# EAGLE board Maya - Leonardo 32U4 board v61 (EAGLE 9.7.0)

Size 39.43 x 37.79 mm. Coordinates in mm from the lower left corner, seen from the top.
Outline: 0.06,0 39.41,0.1 39.43,37.79 0,37.72 0.06,0
Copper layers (1*16): Top 0.035mm / dielectric 1.5mm / Bottom 0.035mm
Design rules "default *": minimum track width 6mil, minimum drill 0.35mm, track to track 6mil, track to pad 6mil, pad to pad 6mil, via to via 6mil, smd to smd 6mil, copper to edge 40mil, drill to drill 6mil, minimum pad ring 10mil, minimum via ring 8mil, stop-mask expansion 4mil, vias tented up to drill 20mil, thermal gap 10mil

## Footprints (pad centres in the part's own frame; a part is rotated, then mirrored left to right if it is on the bottom)
0603 = smd 1.1 x 1: 1 -0.85,0; 2 0.85,0
0805 = smd 0.8 x 1.2: 1 -0.9,0; 2 0.9,0
LED-0603 = smd 1 x 1: A -0.877,0; C 0.877,0
SOD-323 = smd 0.63 x 0.83: A 1.15,0; C -1.15,0
LED-1206 = smd 1.5 x 1.5: + -1.6,0; - 1.6,0
2X3 = drill 1.016 pad 1.88: 1 0,0; 2 0,2.54; 3 2.54,0; 4 2.54,2.54; 5 5.08,0; 6 5.08,2.54
POWER_JACK_PTH = drill 2.997 pad 4.318: GND 0,7.7; GNDBREAK 4.7,10.7; PWR 0,13.7
USB-MINIB = smd 2.5 x 0.5: D+ 2.5,0; D- 2.5,0.8; GND 2.5,-1.6; ID 2.5,-0.8; VBUS 2.5,1.6 | smd 2.5 x 2: S1 -3,4.5; S2 2.5,4.5; S3 -3,-4.5; S4 2.5,-4.5 | hole 0.9: 0,2.2; 0,-2.2
SMT-JUMPER_3_1-NC_PASTE_SILK = smd 0.635 x 1.27: 1 -0.813,0; 2 0,0; 3 0.813,0
SOT95P240X120-3N = smd 1.4 x 1: 1 -1.1,0.95; 2 -1.1,-0.95; 3 1.1,0
R0603 = smd 0.889 x 0.889: 1 0,0.762; 2 0,-0.762
TACTILE_SWITCH_SMD_5.2MM = smd 1.524 x 0.762: 1 -2.794,1.905; 2 2.794,1.905; 3 -2.794,-1.905; 4 2.794,-1.905
TACTILE_SWITCH_SMD_4.5MM = smd 0.7 x 1.1: 1 2.225,1.75; 2 2.225,-1.75; 3 -2.225,-1.75; 4 -2.225,1.75
TQFP44 = smd 1.5 x 0.5: 1 -5.8,4; 2 -5.8,3.2; 3 -5.8,2.4; 4 -5.8,1.6; 5 -5.8,0.8; 6 -5.8,0; 7 -5.8,-0.8; 8 -5.8,-1.6; 9 -5.8,-2.4; 10 -5.8,-3.2; 11 -5.8,-4; 23 5.8,-4; 24 5.8,-3.2; 25 5.8,-2.4; 26 5.8,-1.6; 27 5.8,-0.8; 28 5.8,0; 29 5.8,0.8; 30 5.8,1.6; 31 5.8,2.4; 32 5.8,3.2; 33 5.8,4 | smd 0.5 x 1.5: 12 -4,-5.8; 13 -3.2,-5.8; 14 -2.4,-5.8; 15 -1.6,-5.8; 16 -0.8,-5.8; 17 0,-5.8; 18 0.8,-5.8; 19 1.6,-5.8; 20 2.4,-5.8; 21 3.2,-5.8; 22 4,-5.8; 34 4,5.8; 35 3.2,5.8; 36 2.4,5.8; 37 1.6,5.8; 38 0.8,5.8; 39 0,5.8; 40 -0.8,5.8; 41 -1.6,5.8; 42 -2.4,5.8; 43 -3.2,5.8; 44 -4,5.8
SOT95P280X145-5N = smd 1.21 x 0.59: 1 -1.255,0.95; 2 -1.255,0; 3 -1.255,-0.95; 4 1.255,-0.95; 5 1.255,0.95
SOP65P490X110-8N = smd 1.47 x 0.48: 1 -2.15,0.975; 2 -2.15,0.325; 3 -2.15,-0.325; 4 -2.15,-0.975; 5 2.15,-0.975; 6 2.15,-0.325; 7 2.15,0.325; 8 2.15,0.975
SOT230P700X180-4N = smd 2.15 x 1: 1 -2.9,2.3; 2 -2.9,0; 3 -2.9,-2.3 | smd 2.15 x 3.25: 4 2.9,0
QFN40P400X400X100-33N = smd 0.74 x 0.22: 1 -1.995,1.4; 2 -1.995,1; 3 -1.995,0.6; 4 -1.995,0.2; 5 -1.995,-0.2; 6 -1.995,-0.6; 7 -1.995,-1; 8 -1.995,-1.4; 17 1.995,-1.4; 18 1.995,-1; 19 1.995,-0.6; 20 1.995,-0.2; 21 1.995,0.2; 22 1.995,0.6; 23 1.995,1; 24 1.995,1.4 | smd 0.22 x 0.74: 9 -1.4,-1.995; 10 -1,-1.995; 11 -0.6,-1.995; 12 -0.2,-1.995; 13 0.2,-1.995; 14 0.6,-1.995; 15 1,-1.995; 16 1.4,-1.995; 25 1.4,1.995; 26 1,1.995; 27 0.6,1.995; 28 0.2,1.995; 29 -0.2,1.995; 30 -0.6,1.995; 31 -1,1.995; 32 -1.4,1.995 | smd 2.8 x 2.8: 33 0,0 | drill 0.2 pad 0.3: 33_1 0,0; 33_2 0,1.15; 33_3 1.15,0; 33_4 -1.15,0; 33_5 0,-1.15
CRYSTAL-SMD-5X3.2-4PAD = smd 1.9 x 1.1: 1 -1.85,-1.15; 2 1.85,-1.15; 3 1.85,1.15; 4 -1.85,1.15

## Placement (x,y rotation side)
C1  0.1uF  [0603]  8.4,22.56 270 top
C2  0.1uF  [0603]  10.76,22.83 270 top
C3  18pF  [0603]  31.55,31.07 180 top
C4  18pF  [0603]  15.4,32.52 270 top
C5  1.0uF  [0805]  16.34,35.82 180 top
C6  1.0uF  [0805]  15.71,28.74 270 top
C7  0.1uF  [0603]  19.9,27.86 0 top
C8  0.1uF  [0603]  20.55,35.89 0 top
C9  10uF  [0603]  24.82,35.88 0 top
C10  1.0uF  [0603]  35.46,26.32 0 top
C11  0.1uF  [0603]  30.38,20.44 90 top
C12  0.1uF  [0603]  37.37,19.21 90 top
C13  1.0uF  [0603]  25.42,27.85 0 top
C14  10uF  [0603]  34.06,20.43 180 top
C15  10uF  [0603]  30.55,28.09 0 top
C16  0.1uF  [0603]  48.63,14.51 0 top  (outside the outline)
C17  10uF  [0603]  48.63,11.27 0 top  (outside the outline)
D1  WHITE  [LED-0603]  48.63,17.63 0 top  (outside the outline)
D2  250mA/100V  [SOD-323]  33.98,17.63 180 top
D3  LYellow  [LED-0603]  37.37,23.18 270 top
D4  TXYellow  [LED-0603]  23.83,11.9 0 top
D5  RXYellow  [LED-0603]  20.03,11.84 0 top
D6  ON GREEN  [LED-0603]  16.06,11.82 0 top
D7  SMD-DIODE-SWITCHING-75V-150MA(D1206)  [LED-1206]  10.62,18.54 90 top
F1  6V 0.5A  [0805]  2.06,11.98 270 top
FB1  30Ω/1.8A  [0603]  11.89,11.79 90 top
J1  AVR_SPI_PROG_3X2PTH  [2X3]  5.06,17.56 90 top
J2  POWER_JACK  [POWER_JACK_PTH]  31.24,0.33 0 top
J3  USB_MINI-B_SMT  [USB-MINIB]  6.62,6.01 90 top
JP1  JUMPER-SMT_3_1-NC_PASTE_SILK  [SMT-JUMPER_3_1-NC_PASTE_SILK]  45.09,11.66 0 top  (outside the outline)
Q1  FDN340P  [SOT95P240X120-3N]  35.85,34.35 180 top
R1  10  [0603]  8.31,18.91 90 top
R2  1k  [0603]  48.63,27.23 0 top  (outside the outline)
R3  VARISTOR-5V-28V(0603)  [R0603]  10.14,11.45 180 top
R4  VARISTOR-5V-28V(0603)  [R0603]  6.37,11.48 180 top
R5  22  [0603]  7.86,11.72 90 top
R6  22  [0603]  4.37,11.86 90 top
R7  10k  [0603]  29.09,17.27 180 top
R8  10k  [0603]  27.91,20.42 90 top
R9  1k  [0603]  20.07,9.32 0 top
R10  1k  [0603]  16.03,9.24 0 top
R11  1k  [0603]  23.87,9.36 0 top
R12  1k  [0603]  34.97,23.48 270 top
R13  1k  [0603]  48.63,23.99 0 top  (outside the outline)
R14  470  [0603]  48.63,20.75 0 top  (outside the outline)
S1  [TACTILE_SWITCH_SMD_5.2MM]  21.13,32.1 180 top
S2  MOMENTARY-SWITCH-SPST-SMD-4.5MM  [TACTILE_SWITCH_SMD_4.5MM]  48.31,5.8 0 top  (outside the outline)
U1  32U4  [TQFP44]  19.32,19.92 0 top
U2  LP2985-33DBVR  [SOT95P280X145-5N]  36.07,29.46 0 top
U3  LMV358IDGKR  [SOP65P490X110-8N]  29.53,24.64 180 top
U4  NCP1117ST50T3G  [SOT230P700X180-4N]  19.72,4.1 0 top
U5  CC2640R2FRSMR  [QFN40P400X400X100-33N]  45.24,34.47 0 top  (outside the outline)
Y1  16MHz  [CRYSTAL-SMD-5X3.2-4PAD]  29.93,34.75 0 top

## Library data of the parts
C1 C2 C7 C8 C11 C12 C16 = SparkFun-Capacitors; PROD_ID: CAP-00810
C3 C4 = SparkFun-Capacitors; PROD_ID: CAP-08267
C5 = SparkFun-Capacitors; PROD_ID: CAP-08064
C6 = SparkFun-Capacitors; PROD_ID: CAP-11625
C9 C14 C15 C17 = SparkFun-Capacitors; PROD_ID: CAP-11015
C10 C13 = SparkFun-Capacitors; PROD_ID: CAP-00868
D1 = SparkFun-LED; PROD_ID: DIO-09004
D2 = SparkFun-DiscreteSemi; PROD_ID: DIO-09646
D3-D5 = SparkFun-LED; PROD_ID: DIO-09003
D6 = SparkFun-LED; PROD_ID: DIO-00821
D7 = SMD-DIODE-SWITCHING-75V-150MA_D1206_; AVAILABILITY: Warning; DESCRIPTION: Diode Standard 100V 150mA Surface Mount 1206; MF: Bourns; MP: CD1206-S01575; PACKAGE: 1206 Bourns; PRICE: None
F1 = SparkFun-Fuses; PROD_ID: RES-13945
FB1 = SparkFun-Coils; PROD_ID: NDUC-13805
J1 = SparkFun-Connectors
J2 = SparkFun-Connectors; PROD_ID: CONN-08197
J3 = SparkFun-Connectors; PROD_ID: CONN-08193; SF_ID: PRT-00587
JP1 = SparkFun-Jumpers
Q1 = FDN340P; AVAILABILITY: Good; DESCRIPTION: P-Channel 20V 2A (Ta) 500mW (Ta) Surface Mount SuperSOT-3; MF: ON Semiconductor; MP: FDN340P; PACKAGE: None; PRICE: None; PURCHASE-URL: https://pricing.snapeda.com/search/part/FDN340P/?ref=eda
R1 = SparkFun-Resistors; PROD_ID: RES-09834
R2 R9-R13 = SparkFun-Resistors; PROD_ID: RES-07856
R3 R4 = SMD-RES-VARISTOR-5V-28V_0603_; AVAILABILITY: Good; DESCRIPTION: Varistor 1 Circuit Surface Mount, MLCV 0603 (1608 Metric); MF: Bourns; MP: CG0603MLC-05E; PACKAGE: 0603 Bourns Inc.; PRICE: None; PURCHASE-URL: https://pricing.snapeda.com/search/part/CG0603MLC-05E/?ref=eda
R5 R6 = SparkFun-Resistors; PROD_ID: RES-08698
R7 R8 = SparkFun-Resistors; PROD_ID: RES-00824
R14 = SparkFun-Resistors; PROD_ID: RES-07869
S1 = SparkFun-Switches; PROD_ID: SWCH-08247; SF_SKU: COM-08720
S2 = SparkFun-Switches; PROD_ID: SWCH-09213
U1 = SparkFun-IC-Microcontroller; PROD_ID: IC-11161
U2 = LP2985-33DBVR; AVAILABILITY: Warning; DESCRIPTION: 150-mA, 16-V, low-dropout voltage regulator with enable 5-SOT-23 -40 to 125; MF: Texas Instruments; MP: LP2985-33DBVR; PACKAGE: SOT-23-5 Texas Instruments; PRICE: None; PURCHASE-URL: https://pricing.snapeda.com/search/part/LP2985-33DBVR/?ref=eda
U3 = LMV358IDGKR; AVAILABILITY: Good; DESCRIPTION: Dual Low-Voltage Rail-to-Rail Output Operational Amplifier - see LMV358A for upgraded version 8-VSSOP -40 to 125; MF: Texas Instruments; MP: LMV358IDGKR; PACKAGE: VSSOP-8 Texas Instruments; PRICE: None; PURCHASE-URL: https://pricing.snapeda.com/search/part/LMV358IDGKR/?ref=eda
U4 = NCP1117ST50T3G; AVAILABILITY: Warning; DESCRIPTION: Linear Voltage Regulator IC Positive Fixed 1 Output 1A SOT-223; MF: ON Semiconductor; MP: NCP1117ST50T3G; PACKAGE: SOT-223-4 ON Semiconductor; PRICE: None; PURCHASE-URL: https://pricing.snapeda.com/search/part/NCP1117ST50T3G/?ref=eda
U5 = CC2640R2FRSMR; MANUFACTURER: Texas Instruments; MAXIMUM_PACKAGE_HEIGHT: 1mm; STANDARD: IPC 7351B
Y1 = SparkFun-Clocks; PROD_ID: XTAL-08218; SF_ID: COM-00094

## Nets
+3V3: C10.2 U2.5 U3.6
+5V: C15.1 U4.2 U4.4
A0: U1.36
A1: U1.37
A2: U1.38
A3: U1.39
A4: U1.40
A5: U1.41
AGND: U1.5 U1.15 U1.23 U1.35 U1.43
CMP: C11.2 R7.1 R8.2 U3.5
D0: U1.20
D1: U1.21
D2/SDA: U1.19
D3/SCL: U1.18
D4: U1.25
D5*: U1.31
D6*: U1.27
D7: U1.1
D9/RX: R2.1 U1.29
D10/TX: R13.1 U1.30
D+: J3.D+ R5.1
D-\: J3.D- R4.2 R6.1
DCDC_SW: U5.18
EXP: U5.33 U5.33_1 U5.33_2 U5.33_3 U5.33_4 U5.33_5
GND: C1.2 C2.2 C3.1 C4.1 C5.1 C6.1 C7.1 C8.1 C8.2 C9.1 C9.2 C10.1 C11.1 C12.2 C13.1 C14.2 C15.2 C16.1 C16.2 C17.1 C17.2 D1.C D2.A D3.C FB1.1 FB1.2 J1.6 J2.GND J2.PWR J3.GND J3.S1 J3.S2 J3.S3 J3.S4 R3.1 R4.1 R7.2 S1.3 S1.4 S2.1 S2.4 U2.2 U3.4 U4.1 U5.9 U5.10 U5.12
HWB: U1.33
IO8: U1.28
IO11*: U1.12
IO12: U1.26
IO13*: U1.32 U3.3
KEY-HM19: JP1.1 U5.8
MISO: J1.1 U1.11
MOSI: J1.4 U1.10
N$1: R3.2
N$2: D7.+ J1.5 R1.1 S1.1 S1.2 U1.13
N$3: R12.2 U3.1 U3.2
N$4: Q1.1 U3.7
N$5: C7.2 U1.42
N$6: C6.2 U1.6
N$7: R2.2 U5.1
N$9: D3.A R12.1
N$10: D4.A R11.1
N$11: D5.A R9.1
N$12: D6.A R10.1
N$13: JP1.2 S2.2 S2.3
N$14: R13.2 U5.4
N$15: R14.2 U5.15
N$16: JP1.3 U5.16
N$17: D1.A R14.1
RD+: R5.2 U1.4
RD-: R6.2 U1.3
RXLED: D5.C U1.8
SCK: J1.3 U1.9
TXLED: D4.C U1.22
VCC: C1.1 C2.1 C5.2 C12.1 C13.2 D7.- J1.2 Q1.2 R1.2 R9.2 R10.2 R11.2 U1.2 U1.14 U1.24 U1.34 U1.44 U2.1 U2.3 U3.8
VDDR: U5.28
VDDR_RF: U5.32
VDDS: U5.27
VDDS2: U5.11
VDDS_DCDC: U5.19
VIN: C14.1 D2.C J2.GNDBREAK R8.1 U4.3
VSS: U5.3 U5.7 U5.17 U5.20 U5.29
VUSB: F1.1 Q1.3 U1.7
XTAL1: C3.2 U1.17 Y1.3
XTAL2: C4.2 U1.16 Y1.1
XUSB: F1.2 J3.VBUS

## Tracks (layer width: path | path; a pad name or v marks a point on that pad's centre or on a via)
+3V3  (2 unrouted)
+5V  (2 unrouted)
AGND  (4 unrouted)
CMP  (3 unrouted)
D9/RX  (1 unrouted)
D10/TX  (1 unrouted)
D+  (1 unrouted)
D-\  (2 unrouted)
EXP  (4 unrouted)
GND  (46 unrouted)
IO13*  (1 unrouted)
KEY-HM19  (1 unrouted)
MISO  (1 unrouted)
MOSI  (1 unrouted)
N$2  (5 unrouted)
N$3  (2 unrouted)
N$4  (1 unrouted)
N$5  (1 unrouted)
N$6  (1 unrouted)
N$7  (1 unrouted)
N$9  (1 unrouted)
N$10  (1 unrouted)
N$11  (1 unrouted)
N$12  (1 unrouted)
N$13  (2 unrouted)
N$14  (1 unrouted)
N$15  (1 unrouted)
N$16  (1 unrouted)
N$17  (1 unrouted)
RD+  (1 unrouted)
RD-  (1 unrouted)
RXLED  (1 unrouted)
SCK  (1 unrouted)
TXLED  (1 unrouted)
VCC  (19 unrouted)
VIN  (4 unrouted)
VSS  (4 unrouted)
VUSB  (2 unrouted)
XTAL1  (2 unrouted)
XTAL2  (2 unrouted)
XUSB  (1 unrouted)
(copper drawn outside any net)
  shapes: Top area x1

## Text on the board
tNames: MArduino v1
bNames: Aragon Robotics Innovation Challenge / / Arduino Leonardo 32U4 Prototype v1 / / Maya Ayoub / / Go Dons! / / 2021